# Altium PCB PCB.PcbDoc
Units mil, origin at the board's own origin, x right, y up, seen from the top; angles counter-clockwise.
Board outline 6000 x 4000 mil, 2 copper layers (Top Layer, Bottom Layer); 17 components, 9 nets, 50 pads, 0 vias.
Unrouted connection lines stored in the file: 7.
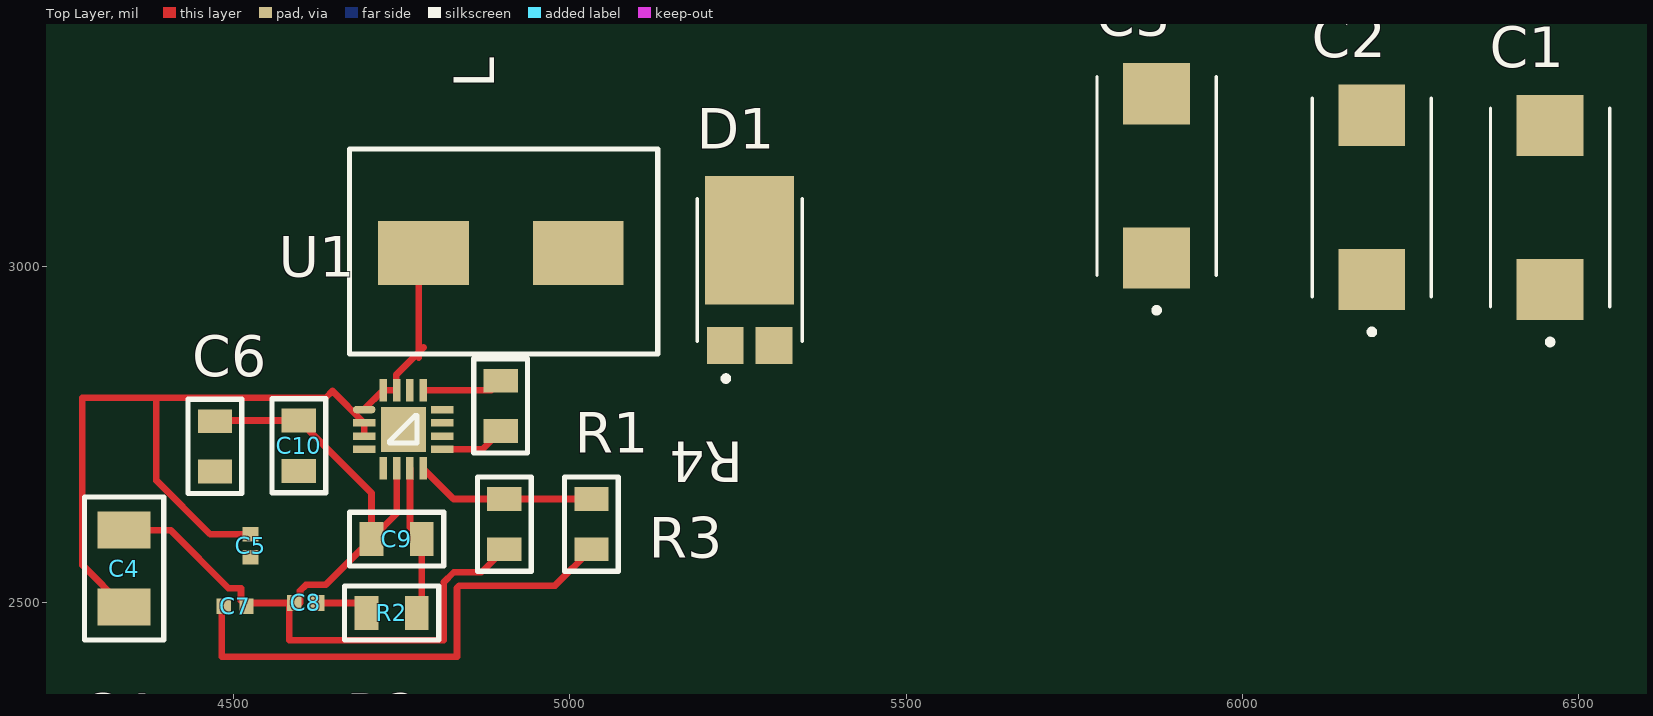
[diagram p0: Top Layer view]
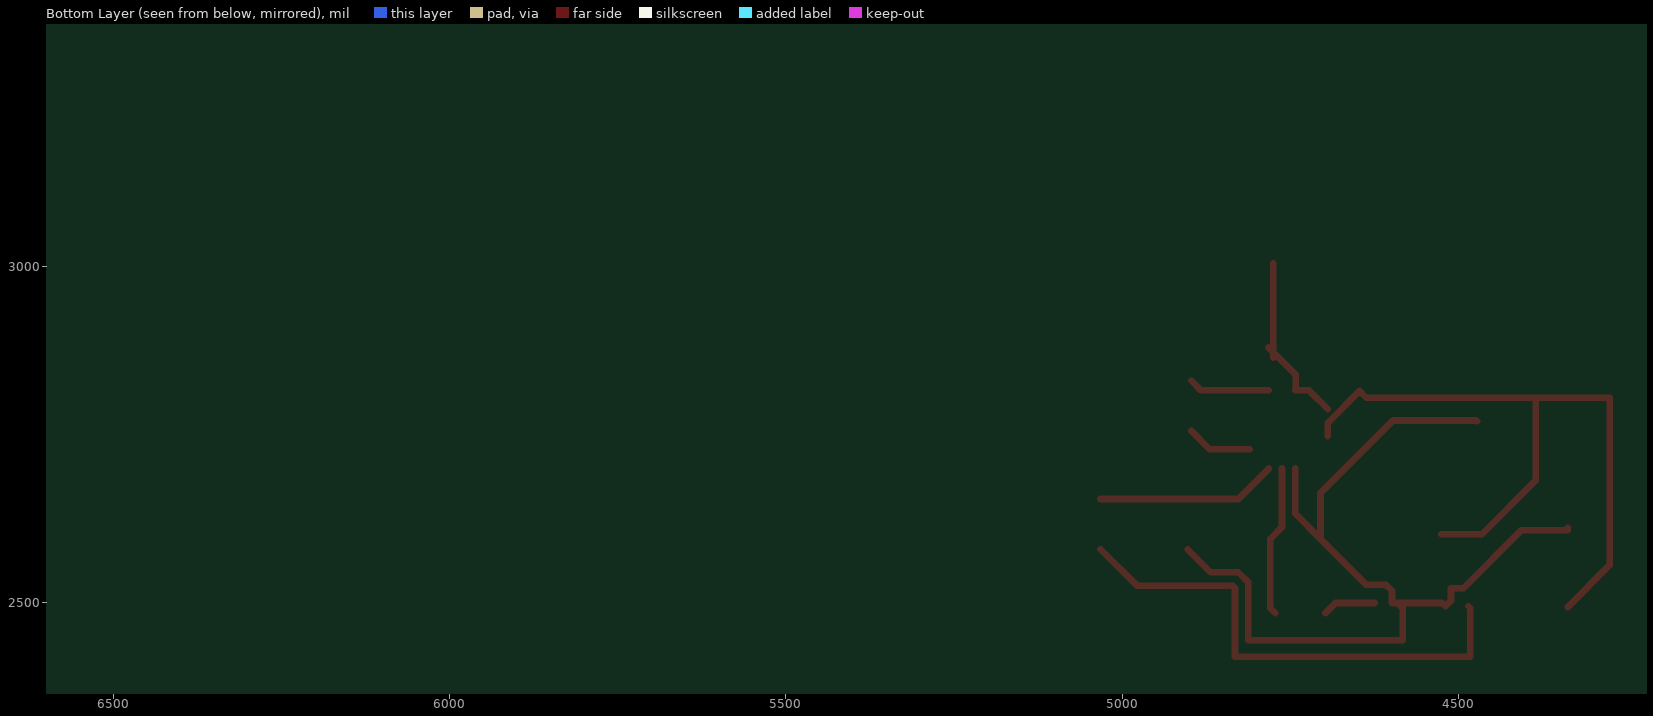
[diagram p1: Bottom Layer view, seen from below]
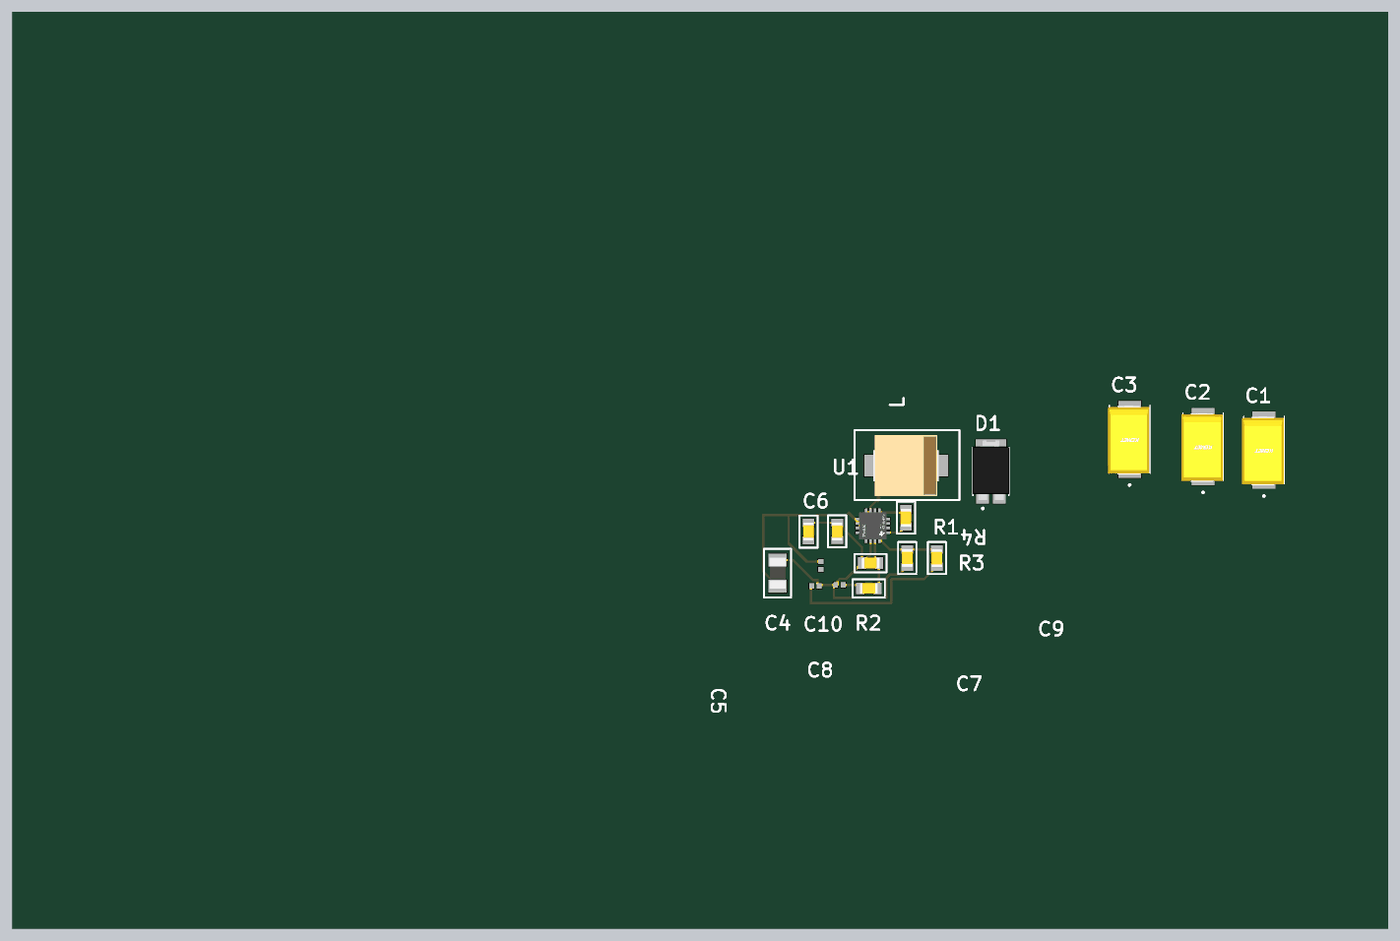
[diagram p2: 3D render of the assembled board from above, using the file's embedded part models]

## Layer stack, top to bottom
Top Solder: solder mask 0.4, Solder Resist, Dk 3.5
Top Layer: signal copper 1.4
Dielectric 1: dielectric 12.6, FR-4, Dk 4.8
Bottom Layer: signal copper 1.4
Bottom Solder: solder mask 0.4, Solder Resist, Dk 3.5

## Board outline
1000,1000 7000,1000 7000,5000 1000,5000

## Design rules (kind name [scope] priority, off if disabled: settings)
Clearance [All] p1: gap=10 ignorepadtopadclearanceinfootprint=FALSE except(0: Arc-Hole Track-Hole SMDPad-Hole THPad-Hole Via-Hole Fill-Hole Poly-Hole Region-Hole Text-Hole)
PolygonConnect [All] p1: connectstyle=Relief reliefconductorwidth=10 reliefentries=4 polygonreliefangle="90 Angle" airgapwidth=10
RoomDefinition TPS5530RTE_Schematic [InComponentClass('TPS5530RTE_Schematic')] p1: confinementstyle=ConfineIn formatcopy=TRUE lockcomponents=FALSE outline 2797.17,2410 6212.17,2410 6212.17,3010 2797.17,3010
RoutingVias [All] p1: holewidth=28 width=50 viastyle="Through Hole" minholewidth=28 minwidth=50 maxholewidth=28 maxwidth=50
SolderMaskExpansion [All] p1: expansion=4
Width [All] p1: maxlimit=10 minlimit=10 preferedwidth=10
30 further rules are at their usual default settings.

## Components (designator, comment, footprint, x,y, rotation, side; value= is the part's Value field where it differs from the comment)
C1 "10uF_New" CAPPM7343X310N 6457.17,3087.91 r90 top
C2 "10uF_New" CAPPM7343X310N 6192.17,3102.91 r90 top
C3 "10uF_New" CAPPM7343X310N 5872.17,3135 r90 top
C4 "10uF" C/R1206 4337.17,2551.06 r90 top
C5 "0.1uF" C/R0402 4525,2585 r270 top
C6 "10uF" C/R0805 4471.93,2735.47 r90 top
C7 "0.1uF" C/R0402 4502.17,2495 r180 top
C8 "510pF" C/R0402 4607.17,2500 r180 top
C9 "22nF" C/R0805 4745.04,2595.24 r0 top
C10 "22nF" C/R0805 4597.17,2730.83 r270 top
D1 "D1" D1 5272.17,2930 r0 top
L "2.2uH" L1 4897.17,3020 r180 top
R1 "127kohm" C/R0805 5032.17,2614.25 r270 top
R2 "2.94kOhm" C/R0805 4737.64,2485.24 r0 top
R3 "10kOhms" C/R0805 4902.17,2620 r90 top
R4 "38.3kohm" C/R0805 4897.17,2790 r270 top
U1 "TPS55330RTE" TPS55330 4752.17,2757.91 r0 top

## Footprints (in the part's own frame and the unit in brackets; to place one, negate y for a bottom-side part, rotate by r counter-clockwise, add the part's x,y. Pads: shape width x height; smd on the part's side, far side on the other; paste and mask are expansions set on the pad)
C/R0402 [mm]
  rect 0.54x0.6 smd: 1(-0.432,0) 2(0.432,0)
C/R0805 [mm]
  rect 0.9x1.3 smd: 1(-1.023,-0.006) 2(0.877,-0.006)
  silkscreen extent -1.85,-1.02 1.71,1.01, body extent -1.06,-0.61 0.94,0.59, height 0.96
C/R1206 [mm]
  rect 1.4x2 smd: 1(-1.45,0) 2(1.45,0)
  silkscreen extent -2.7,-1.5 2.7,1.5, body extent -1.7,-0.9 1.7,0.9, height 1.19
CAPPM7343X310N [mm]
  rect 2.31x2.52 smd: 1(-3.1,0) 2(3.1,0)
  silkscreen extent -5.18,-2.25 3.75,2.25, body extent -3.9,-2.2 3.7,2.4, height 3.11
D1 [mm]
  rect 1.39x1.4 smd: 1(-1.047,-1.205) 2(0.793,-1.205)
  rect 3.36x4.86 smd: 3(-0.127,2.777)
  silkscreen extent -2.11,-2.55 1.86,4.34, body extent -2.15,-1.52 1.91,5.08, height 1.16
L1 [mil]
  rect 135x95 smd: 1(-115,0) 2(115,0)
  silkscreen extent -233,-155 225,150, body extent -143,-133 143,133, height 199
TPS55330 [mm]
  oval 0.85x0.28 smd: 1(-1.475,0.75)
  rect 0.85x0.28 smd: 2(-1.475,0.25) 3(-1.475,-0.25) 4(-1.475,-0.75) 9(1.475,-0.75) 10(1.475,-0.25) 11(1.475,0.25) 12(1.475,0.75)
  rect 1.7x1.7 smd: 4(0,0)
  rect 0.28x0.85 smd: 5(-0.75,-1.475) 6(-0.25,-1.475) 7(0.25,-1.475) 8(0.75,-1.475) 13(0.75,1.475) 14(0.25,1.475) 15(-0.25,1.475) 16(-0.75,1.475)
  silkscreen extent -0.51,-0.51 0.51,0.52, body extent -1.51,-1.51 1.51,1.51, height 0.81

## Part data
C1 C2 C3: library part T495D106M035ATE125, "CAP TANT 10UF 35V 20% 2917", Capacitance=10μF, Capacitance Tolerance="± 20%", Capacitor Case Style="2917 ^7343 Metric]", Manufacturer=KEMET, Operating Temperature Max=125°C, Operating Temperature Min=-55°C, Voltage Rating=35V, ComponentLink1Description=https://www.verical.com/server-webapp/html/getDatasheet?partID=44813&src-supplier=Verical, ComponentLink1URL=https://www.verical.com/server-webapp/html/getDatasheet?partID=44813&src-supplier=Verical, ComponentLink2Description=http://www.farnell.com/datasheets/1761160.pdf?src-supplier=Element14, ComponentLink2URL=http://www.farnell.com/datasheets/1761160.pdf?src-supplier=Element14, ComponentLink3Description=http://www.farnell.com/datasheets/1744560.pdf?src-supplier=Element14, ComponentLink3URL=http://www.farnell.com/datasheets/1744560.pdf?src-supplier=Element14, ESR=0.125ohm, Manufacturer Part Number=T495D106M035ATE125, Packaging="Full Reel", Pricing 1="1=1.79, 10=1.449, 100=1.1066 (USD)", Product Range="KEMET - T495 Series", Stock 1=5675, Supplier 1=Digi-Key
C4: library part GRM31CR61C106KA88L, "Cap Ceramic 10uF 16V X5R 10% SMD 1206 85C T/R", Capacitance="10000000 pF", Case Size/Dimension=1206, Dielectric=X5R, Manufacturer=Murata, Rated voltage="16 V", Tolerance (%)="±10 %", ComponentLink1Description=http://psearch.murata.com/capacitor/product/GRM31CR61C106KA88%23.pdf?src-supplier=Avnet+Europe, ComponentLink1URL=http://psearch.murata.com/capacitor/product/GRM31CR61C106KA88%23.pdf?src-supplier=Avnet+Europe, ComponentLink2Description=https://www.murata.com/~/media/webrenewal/support/library/catalog/products/capacitor/mlcc/c02e.ashx?la=en-us&src-supplier=Digi-Key, ComponentLink2URL=https://www.murata.com/~/media/webrenewal/support/library/catalog/products/capacitor/mlcc/c02e.ashx?la=en-us&src-supplier=Digi-Key, ComponentLink3Description=http://search.murata.co.jp/Ceramy/image/img/A01X/partnumbering_e_01.pdf?src-supplier=Digi-Key, ComponentLink3URL=http://search.murata.co.jp/Ceramy/image/img/A01X/partnumbering_e_01.pdf?src-supplier=Digi-Key, ComponentLink4Description=http://psearch.murata.com/capacitor/product/GRM31CR61A476ME15%23.pdf?src-supplier=Future+Electronics, ComponentLink4URL=http://psearch.murata.com/capacitor/product/GRM31CR61A476ME15%23.pdf?src-supplier=Future+Electronics, ComponentLink5Description=https://www.distrelec.biz/Web/Downloads/_t/ds/murata_MLCC_eng_tds.pdf?mime=application%2Fpdf&src-supplier=Distrelec, ComponentLink5URL=https://www.distrelec.biz/Web/Downloads/_t/ds/murata_MLCC_eng_tds.pdf?mime=application%2Fpdf&src-supplier=Distrelec, ComponentLink6Description=http://www.farnell.com/datasheets/608985.pdf?src-supplier=Element14, ComponentLink6URL=http://www.farnell.com/datasheets/608985.pdf?src-supplier=Element14, ComponentLink7Description=http://psearch.en.murata.com/capacitor/product/GRM31CR61C106KA88%23.pdf?src-supplier=Avnet, ComponentLink7URL=http://psearch.en.murata.com/capacitor/product/GRM31CR61C106KA88%23.pdf?src-supplier=Avnet, Manufacturer Part Number=GRM31CR61C106KA88L, Pricing 1="1=0.37, 10=0.259 (USD)", Stock 1=45, Supplier 1=Digi-Key
C5 C7: library part GRM155R71C104KA88D, "CAP CER 0.1UF 16V X7R 0402", Capacitance="0.1 μF", Case Size/Dimension=0402, Dielectric=X7R, Manufacturer=Murata, Rated voltage="16 V", Tolerance (%)="±10 %", ComponentLink1Description=http://www.farnell.com/datasheets/4360.pdf?src-supplier=Element14, ComponentLink1URL=http://www.farnell.com/datasheets/4360.pdf?src-supplier=Element14, ComponentLink2Description=https://www.distrelec.biz/Web/Downloads/_t/ds/murata_MLCC_eng_tds.pdf?mime=application%2Fpdf&src-supplier=Distrelec, ComponentLink2URL=https://www.distrelec.biz/Web/Downloads/_t/ds/murata_MLCC_eng_tds.pdf?mime=application%2Fpdf&src-supplier=Distrelec, ComponentLink3Description=http://psearch.murata.com/capacitor/product/GRM155R71C103KA01%23.pdf?src-supplier=Future+Electronics, ComponentLink3URL=http://psearch.murata.com/capacitor/product/GRM155R71C103KA01%23.pdf?src-supplier=Future+Electronics, ComponentLink4Description=https://www.verical.com/server-webapp/html/getDatasheet?partID=85307&src-supplier=Verical, ComponentLink4URL=https://www.verical.com/server-webapp/html/getDatasheet?partID=85307&src-supplier=Verical, ComponentLink5Description=https://www.murata.com/~/media/webrenewal/support/library/catalog/products/capacitor/mlcc/c02e.ashx?la=en-us&src-supplier=Digi-Key, ComponentLink5URL=https://www.murata.com/~/media/webrenewal/support/library/catalog/products/capacitor/mlcc/c02e.ashx?la=en-us&src-supplier=Digi-Key, ComponentLink6Description=https://produktinfo.conrad.com/datenblaetter/450000-474999/454098-da-01-en-VS_KONDENSATOR_0402.pdf?src-supplier=Conrad, ComponentLink6URL=https://produktinfo.conrad.com/datenblaetter/450000-474999/454098-da-01-en-VS_KONDENSATOR_0402.pdf?src-supplier=Conrad, Manufacturer Part Number=GRM155R71C104KA88D, Pricing 1="1=0.1, 10=0.034, 100=0.0152, 500=0.0109, 1000=0.0086, 2500=0.0078, 5000=0.0072 (USD)", Stock 1=143464293, Supplier 1=Digi-Key
C6: library part CGA6P3X7S1H106K250AB, "TDK - CGA6P3X7S1H106K250AB - CAP, 10μF, 50V, 10%, X7S, 1210", Capacitance=10μF, Manufacturer=TDK, Operating Temperature="-55°C ~ 125°C", Package / Case="1210 (3225 Metric)", PCN Part Number="MLCC Part Number Change 30/Nov/2012", Ratings=AEC-Q200, Standard Package=1, Temperature Coefficient=X7S, Tolerance=±10%, Voltage - Rated=50V, Applications=Automotive, Category=Capacitors, ComponentLink1Description=http://www.farnell.com/datasheets/1807242.pdf?src-supplier=Element14, ComponentLink1URL=http://www.farnell.com/datasheets/1807242.pdf?src-supplier=Element14, ComponentLink2Description=http://www.mouser.com/ds/2/400/lcc_automotive_general_en-843974.pdf?src-supplier=Mouser, ComponentLink2URL=http://www.mouser.com/ds/2/400/lcc_automotive_general_en-843974.pdf?src-supplier=Mouser, Family="Ceramic Capacitors", Featured Product="CGA Series MLCC Capacitors", Features=-, Height - Seated (Max)=-, Kits="445-9005-KIT-ND  - KIT CAP CER AUTO 6.3V-50V SMD SAMPLE KIT 1005-ND  - KIT CAP CER AUTO 6.3V-50V", Lead Spacing=-, Lead Style=-, Manufacturer Part Number=CGA6P3X7S1H106K250AB, Mounting Type="Surface Mount, MLCC", Online Catalog="CGA Series, Automotive General, Mid and High Voltage", Other Names=445-7004-1, Packaging="Cut Tape (CT)? ?", Pricing 1="1=1.03, 10=0.785, 100=0.5615, 500=0.4347 (USD)", Product Training Modules="CGA Series for Automotive Applications SEAT, CCV, and TVCL Design Tools Guide to Replacing an Electrolytic Capacitor with an MLCC", RoHS Information="RoHS Certificate-MLCC", Series=CGA, Size / Dimension="0.126\" L x 0.098\" W (3.20mm x 2.50mm)", Stock 1=318964, Supplier 1=Digi-Key, Thickness (Max)="0.110\" (2.80mm)"
C8: library part GRM1555C1H511GA01D, "Cap Ceramic 510pF 50V C0G 2% SMD 0402 125C Paper T/R", Capacitance="510 pF", Case Code - in=0402, Case Code - mm=1005, Case Height="0.5 mm", Case Length="1 mm", Dielectric="C0G (NP0)", Manufacturer=Murata, Maximum Operating Temperature="+ 125 C", Minimum Operating Temperature="- 55 C", Package / Case="0402 (1005 metric)", Tolerance="2 %", Voltage Rating DC="50 V", Brand="Murata Electronics", Case Width="0.5 mm", ComponentLink1Description=https://www.murata.com/~/media/webrenewal/support/library/catalog/products/capacitor/mlcc/c02e.ashx?la=en-us&src-supplier=Digi-Key, ComponentLink1URL=https://www.murata.com/~/media/webrenewal/support/library/catalog/products/capacitor/mlcc/c02e.ashx?la=en-us&src-supplier=Digi-Key, Factory Pack Quantity=10000, Manufacturer Part Number=GRM1555C1H511GA01D, Packaging=Reel, Pricing 1="1=0.19, 10=0.131, 100=0.0664, 500=0.0454, 1000=0.0402, 2500=0.0385, 5000=0.035 (USD)", Product="General Type MLCCs", Product Category="Multilayer Ceramic Capacitors MLCC - SMD/SMT", RoHS=Details, Series=GRM, Stock 1=21664, Supplier 1=Digi-Key, Termination Style=SMD/SMT, Type="General Purpose MLCC"
C9: library part CGA4J2C0G1H223J125AA, "TDK - CGA4J2C0G1H223J125AA - KONDENSATOR 0.022μF 50V 5% C0G/NP0 0805", Capacitance=0.022μF, Manufacturer=TDK, Operating Temperature="-55°C ~ 125°C", Package / Case="0805 (2012 Metric)", PCN Part Number="MLCC Part Number Change 30/Nov/2012", Ratings=AEC-Q200, Standard Package=1, Temperature Coefficient="C0G, NP0", Tolerance=±5%, Voltage - Rated=50V, Applications=Automotive, Category=Capacitors, ComponentLink1Description=http://www.mouser.com/ds/2/400/lcc_automotive_general_en-843974.pdf?src-supplier=Mouser, ComponentLink1URL=http://www.mouser.com/ds/2/400/lcc_automotive_general_en-843974.pdf?src-supplier=Mouser, Family="Ceramic Capacitors", Featured Product="CGA Series MLCC Capacitors", Features=-, Height - Seated (Max)=-, Lead Spacing=-, Lead Style=-, Manufacturer Part Number=CGA4J2C0G1H223J125AA, Mounting Type="Surface Mount, MLCC", Online Catalog="CGA Series, Automotive General, Mid and High Voltage", Other Names=445-6949-6, Packaging="Digi-Reel?? ?", Pricing 1="5=0.594, 10=0.351, 25=0.305, 50=0.259, 100=0.213, 250=0.194, 500=0.175, 1000=0.152 (USD)", Product Training Modules="CGA Series for Automotive Applications SEAT, CCV, and TVCL Design Tools Guide to Replacing an Electrolytic Capacitor with an MLCC", RoHS Information="RoHS Certificate-MLCC", Series=CGA, Size / Dimension="0.079\" L x 0.049\" W (2.00mm x 1.25mm)", Stock 1=19725, Supplier 1=Newark, Thickness (Max)="0.057\" (1.45mm)"
C10: library part C0805C223K5RAC, "KEMET 22nF Multilayer Ceramic Capacitor (MLCC) 50V dc 10% X7R dielectric max op. temp. 125C", Capacitance Tolerance=±10%, Manufacturer=KEMET, Rated voltage=50VDC, Temperature range=-55...+125°C, Capacitance=22nF, Ceramic type=X7R, ComponentLink1Description=http://www.mouser.com/ds/2/212/KEM_C1002_X7R_SMD-1102033.pdf?src-supplier=Mouser, ComponentLink1URL=http://www.mouser.com/ds/2/212/KEM_C1002_X7R_SMD-1102033.pdf?src-supplier=Mouser, ComponentLink2Description=https://www1.elfa.se/data1/wwwroot/assets/datasheets/slCeramic-Chip-Condensers_e.pdf?src-supplier=Distrelec, ComponentLink2URL=https://www1.elfa.se/data1/wwwroot/assets/datasheets/slCeramic-Chip-Condensers_e.pdf?src-supplier=Distrelec, Construction form=0805, Manufacturer Part Number=C0805C223K5RAC, Pricing 1="1=0.1, 10=0.024, 100=0.016, 500=0.014, 1000=0.011, 4000=0.008 (USD)", Stock 1=133849, Supplier 1=Mouser
D1: library part PDS760-13, "DIODE SCHOTTKY 60V 7A POWERDI5", If - Forward Current="7 A", Ifsm - Forward Surge Current="275 A", Ir - Reverse Current="200 uA", Manufacturer=Diodes, Maximum Operating Temperature="+ 150 C", Minimum Operating Temperature="- 65 C", Operating Temperature Range="- 65 C to + 150 C", Package / Case=POWERDI-5, Vf - Forward Voltage="0.62 V", Vrrm - Repetitive Reverse Voltage="60 V", Brand="Diodes Incorporated", ComponentLink1Description=https://www.diodes.com/assets/Datasheets/ds30477.pdf?src-supplier=Digi-Key, ComponentLink1URL=https://www.diodes.com/assets/Datasheets/ds30477.pdf?src-supplier=Digi-Key, ComponentLink2Description=http://www.mouser.com/ds/2/115/ds30477-62081.pdf?src-supplier=Mouser, ComponentLink2URL=http://www.mouser.com/ds/2/115/ds30477-62081.pdf?src-supplier=Mouser, ComponentLink3Description=http://www.farnell.com/datasheets/1915491.pdf?src-supplier=Element14, ComponentLink3URL=http://www.farnell.com/datasheets/1915491.pdf?src-supplier=Element14, ComponentLink4Description=http://www.diodes.com/datasheets/ds30477.pdf?src-supplier=Avnet, ComponentLink4URL=http://www.diodes.com/datasheets/ds30477.pdf?src-supplier=Avnet, ComponentLink5Description=http://www.diodes.com/datasheets/ds30477.pdf?src-supplier=Future+Electronics, ComponentLink5URL=http://www.diodes.com/datasheets/ds30477.pdf?src-supplier=Future+Electronics, ComponentLink6Description=http://www.diodes.com/datasheets/ds30477.pdf?src-supplier=Avnet+Europe, ComponentLink6URL=http://www.diodes.com/datasheets/ds30477.pdf?src-supplier=Avnet+Europe, Configuration="Single Dual Anode", Factory Pack Quantity=5000, Height="1.15 mm", Length="4.05 mm", Manufacturer Part Number=PDS760-13, Mounting Style=SMD/SMT, Packaging=Reel, Pricing 1="1=1.54, 10=1.381, 100=1.0764, 500=0.8892, 1000=0.702 (USD)", Product="Schottky Diodes", Product Category="Schottky Diodes & Rectifiers", RoHS=True, Series=PDS560, Stock 1=80872, Supplier 1=Digi-Key, Technology=Si, Type="Schottky Diode", Unit Weight="0.003386 oz", Width="5.45 mm"
L: library part IHLP2525EZER2R2M01, "Fixed Inductors 2.2uH 20%", Inductance="2.2 uH", Manufacturer="Vishay Dale", Maximum DC Current="10 A", Maximum DC Resistance="13.6 mOhms", Operating Temperature Range="- 55 C to + 125 C", Package / Case="2525 (6363 metric)", Self Resonant Frequency="1 MHz", Test Frequency="100 kHz", Tolerance="20 %", Brand="Vishay / Dale", ComponentLink1Description=http://uk.rs-online.com/webdocs/102c/0900766b8102c936.pdf?src-supplier=RSComponents, ComponentLink1URL=http://uk.rs-online.com/webdocs/102c/0900766b8102c936.pdf?src-supplier=RSComponents, ComponentLink2Description=http://www.mouser.com/ds/2/427/ihlp-2525ez-01-221830.pdf?src-supplier=Mouser, ComponentLink2URL=http://www.mouser.com/ds/2/427/ihlp-2525ez-01-221830.pdf?src-supplier=Mouser, ComponentLink3Description=http://www.farnell.com/datasheets/2047080.pdf?src-supplier=Element14, ComponentLink3URL=http://www.farnell.com/datasheets/2047080.pdf?src-supplier=Element14, Factory Pack Quantity=500, Height="5 mm", Length="6.86 mm", Manufacturer Part Number=IHLP2525EZER2R2M01, Mounting Style="Solder Pad", Packaging=Reel, Pricing 1="1=3.11, 10=2.846, 100=1.863 (USD)", Product="Power Inductors", Product Category="Fixed Inductors", RoHS=True, Series=IHLP-2525EZ-01, Shielding=Shielded, Stock 1=2918, Supplier 1=Digi-Key, Termination Style=SMD/SMT, Type="Low Profile High Current IHLP Inductors", Width="6.47 mm"
R1: library part ERA-6AEB1273V, "RES SMD 127K OHM 0.1% 1/8W 0805", Manufacturer=Panasonic, Operating Temperature Max=155°C, Operating Temperature Min=-55°C, Operating Temperature Range="-55°C to +155°C", Power Rating=125mW, Resistance Tolerance="± 0.1%", Resistor Case Style="0805 [2012 Metric]", Resistor Element Material="Thin Film", Resistor Mounting=SMD, Temperature Coefficient="± 25ppm/°C", Voltage Rating=100V, ComponentLink1Description=http://www.farnell.com/datasheets/485442.pdf?src-supplier=Farnell, ComponentLink1URL=http://www.farnell.com/datasheets/485442.pdf?src-supplier=Farnell, ComponentLink2Description=http://industrial.panasonic.com/www-data/pdf/AOA0000/AOA0000CE26.pdf?src-supplier=Avnet, ComponentLink2URL=http://industrial.panasonic.com/www-data/pdf/AOA0000/AOA0000CE26.pdf?src-supplier=Avnet, ComponentLink3Description=http://www.farnell.com/datasheets/485442.pdf?src-supplier=Element14, ComponentLink3URL=http://www.farnell.com/datasheets/485442.pdf?src-supplier=Element14, ComponentLink4Description=http://uk.rs-online.com/webdocs/0eb1/0900766b80eb1d8c.pdf?src-supplier=RSComponents, ComponentLink4URL=http://uk.rs-online.com/webdocs/0eb1/0900766b80eb1d8c.pdf?src-supplier=RSComponents, ComponentLink5Description=http://www.produktinfo.conrad.com/datenblaetter/1100000-1199999/001181360-da-01-en-WIDERSTAND_ERA_0805_127K_0_1__5000ST.pdf?src-supplier=Conrad, ComponentLink5URL=http://www.produktinfo.conrad.com/datenblaetter/1100000-1199999/001181360-da-01-en-WIDERSTAND_ERA_0805_127K_0_1__5000ST.pdf?src-supplier=Conrad, External Depth=1.25mm, External Length / Height=0.5mm, External Width=2mm, Manufacturer Part Number=ERA-6AEB1273V, No. of Pins=2, Packaging=Reel, Pricing 1="1=0.36, 10=0.302, 100=0.1182, 1000=0.0495, 2500=0.0454 (USD)", Product Range="PANASONIC - ERA Series Metal Film Chip Resistor", Resistance=127kohm, Series=ERA, Stock 1=14724, Supplier 1=Digi-Key
R2: library part ERA-6AEB2941V, "RES SMD 2.94K OHM 0.1% 1/8W 0805", Manufacturer=Panasonic, Operating Temperature Max=155°C, Operating Temperature Min=-55°C, Operating Temperature Range="-55°C to +155°C", Power Rating=125mW, Resistance=2.94kohm, Resistance Tolerance="± 0.1%", Resistor Case Style="0805 [2012 Metric]", Resistor Element Material="Thin Film", Resistor Mounting=SMD, Temperature Coefficient="± 25ppm/°C", Voltage Rating=100V, ComponentLink1Description=http://uk.rs-online.com/webdocs/0eb1/0900766b80eb1d8c.pdf?src-supplier=RSComponents, ComponentLink1URL=http://uk.rs-online.com/webdocs/0eb1/0900766b80eb1d8c.pdf?src-supplier=RSComponents, ComponentLink2Description=http://www.farnell.com/datasheets/485442.pdf?src-supplier=Farnell, ComponentLink2URL=http://www.farnell.com/datasheets/485442.pdf?src-supplier=Farnell, ComponentLink3Description=http://industrial.panasonic.com/www-data/pdf/AOA0000/AOA0000CE26.pdf?src-supplier=Avnet, ComponentLink3URL=http://industrial.panasonic.com/www-data/pdf/AOA0000/AOA0000CE26.pdf?src-supplier=Avnet, ComponentLink4Description=http://www.farnell.com/datasheets/485442.pdf?src-supplier=Element14, ComponentLink4URL=http://www.farnell.com/datasheets/485442.pdf?src-supplier=Element14, ComponentLink5Description=http://industrial.panasonic.com/www-data/pdf/AOA0000/AOA0000CE26.pdf?src-supplier=Avnet+Europe, ComponentLink5URL=http://industrial.panasonic.com/www-data/pdf/AOA0000/AOA0000CE26.pdf?src-supplier=Avnet+Europe, ComponentLink6Description=http://www.mouser.com/ds/2/315/AOA0000C237-1100991.pdf?src-supplier=Mouser, ComponentLink6URL=http://www.mouser.com/ds/2/315/AOA0000C237-1100991.pdf?src-supplier=Mouser, ComponentLink7Description=http://www.produktinfo.conrad.com/datenblaetter/1100000-1199999/001181273-da-01-en-WIDERSTAND_ERA_0805_2K94_0_1__5000ST.pdf?src-supplier=Conrad, ComponentLink7URL=http://www.produktinfo.conrad.com/datenblaetter/1100000-1199999/001181273-da-01-en-WIDERSTAND_ERA_0805_2K94_0_1__5000ST.pdf?src-supplier=Conrad, External Depth=1.25mm, External Length / Height=0.5mm, External Width=2mm, Manufacturer Part Number=ERA-6AEB2941V, No. of Pins=2, Packaging=Reel, Pricing 1="1=0.36, 10=0.302, 100=0.1182, 1000=0.0495, 2500=0.0454 (USD)", Product Range="PANASONIC - ERA Series", Series=ERA, Stock 1=28336, Supplier 1=Digi-Key
R3: library part CRCW080510K0FKEC, "Res Thick Film 0805 10K Ohm 1% 0.125W(1/8W) ±100ppm/C Molded SMD Automotive Paper T/R", Manufacturer="Vishay Dale", Operating Temperature="-55°C ~ 155°C", Package / Case="0805 (2012 Metric)", Power (Watts)="0.125W, 1/8W", Resistance (Ohms)=10k, Supplier Device Package=0805, Temperature Coefficient=±100ppm/°C, Tolerance=±1%, Category=Resistors, ComponentLink1Description=http://www.vishay.com/docs/20035/dcrcwe3.pdf?src-supplier=Avnet, ComponentLink1URL=http://www.vishay.com/docs/20035/dcrcwe3.pdf?src-supplier=Avnet, Composition="Thick Film", Failure Rate=-, Family="Chip Resistor - Surface Mount", Features="Automotive AEC-Q200", Height="0.020\" (0.50mm)", Manufacturer Part Number=CRCW080510K0FKEC, Number of Terminations=2, Packaging="Tape & Reel (TR)", Part Status=Active, Pricing 1="1=0.1, 10=0.066, 100=0.0267, 1000=0.012, 2500=0.0104, 5000=0.0086 (USD)", Series=CRCW, Size / Dimension="0.079\" L x 0.049\" W (2.00mm x 1.25mm)", Stock 1=19837, Supplier 1=Digi-Key
R4: library part ERA-6AEB3832V, "RES SMD 38.3K OHM 0.1% 1/8W 0805", Manufacturer=Panasonic, Operating Temperature Max=155°C, Operating Temperature Min=-55??C, Operating Temperature Range="-55°C to +155°C", Power Rating=125mW, Resistance Tolerance="± 0.1%", Resistor Case Style="0805 [2012 Metric]", Resistor Element Material="Thin Film", Resistor Mounting=SMD, Temperature Coefficient="± 25ppm/°C", Voltage Rating=100V, ComponentLink1Description=http://uk.rs-online.com/webdocs/0eb1/0900766b80eb1d8c.pdf?src-supplier=RSComponents, ComponentLink1URL=http://uk.rs-online.com/webdocs/0eb1/0900766b80eb1d8c.pdf?src-supplier=RSComponents, ComponentLink2Description=http://industrial.panasonic.com/www-data/pdf/AOA0000/AOA0000CE26.pdf?src-supplier=Avnet, ComponentLink2URL=http://industrial.panasonic.com/www-data/pdf/AOA0000/AOA0000CE26.pdf?src-supplier=Avnet, ComponentLink3Description=http://industrial.panasonic.com/www-data/pdf/AOA0000/AOA0000CE26.pdf?src-supplier=Avnet+Europe, ComponentLink3URL=http://industrial.panasonic.com/www-data/pdf/AOA0000/AOA0000CE26.pdf?src-supplier=Avnet+Europe, ComponentLink4Description=http://www.produktinfo.conrad.com/datenblaetter/1100000-1199999/001181330-da-01-en-WIDERSTAND_ERA_0805_38K3_0_1__5000ST.pdf?src-supplier=Conrad, ComponentLink4URL=http://www.produktinfo.conrad.com/datenblaetter/1100000-1199999/001181330-da-01-en-WIDERSTAND_ERA_0805_38K3_0_1__5000ST.pdf?src-supplier=Conrad, External Depth=1.25mm, External Length / Height=0.5mm, External Width=2mm, Manufacturer Part Number=ERA-6AEB3832V, No. of Pins=2, Packaging=Reel, Pricing 1="1=0.36, 10=0.302, 100=0.1182, 1000=0.0495, 2500=0.0454 (USD)", Product Range="PANASONIC - ERA", Resistance=38.3kohm, Series=ERA, Stock 1=22091, Supplier 1=Digi-Key
U1: Current - Output=5A, Frequency - Switching="94kHz ~ 1.14MHz", Manufacturer="Texas Instruments", Manufacturer Part Number=TPS55330RTER, Operating Temperature="-40°C ~ 150°C", Package / Case="16-WFQFN Exposed Pad", Standard Package=3,000, Supplier Device Package="16-WQFN (3x3)", Voltage - Input="2.9 V ~ 16 V", Voltage - Output="2.9 V ~ 22 V", Category="Integrated Circuits (ICs)", ComponentLink1Description=http://www.ti.com/lit/ds/symlink/tps55330.pdf?src-supplier=Digi-Key, ComponentLink1URL=http://www.ti.com/lit/ds/symlink/tps55330.pdf?src-supplier=Digi-Key, ComponentLink2Description=http://www.ti.com/lit/ds/symlink/tps55330.pdf?src-supplier=Avnet, ComponentLink2URL=http://www.ti.com/lit/ds/symlink/tps55330.pdf?src-supplier=Avnet, Family="PMIC - Voltage Regulators - DC DC Switching Regulators", Minimum Quantity="Step-Up (Boost), Flyback, Sepic", Mounting Type="Surface Mount", Number of Outputs=1, Output Type=Adjustable, Package/Case="16-WFQFN Exposed Pad", Packaging="Tape & Reel (TR)", Pricing 1="1=3.12, 10=2.804, 100=2.1799, 500=1.8853, 1000=1.5672 (USD)", PWM Type="Current Mode", Quantity Available="Tape & Reel (TR)Alternate Packaging", Stock 1=5703, Supplier 1=Digi-Key, Synchronous Rectifier=No, Type="Step-Up (Boost), Flyback, Sepic"

## Nets (pads, with @x,y where several pads share a name; then routed paths per layer and width w, separated by ;. In a path a pad name is that pad's centre, name@x,y a point inside that pad or via, vN(x,y) a via of type N, cw(c..) or ccw(c..) an arc to the next point about the centre after c; other vN are vias at no path point)
GND: C4.2 C5.2 C6.2 C7.1 C8.2 C9.1 C10.1 R3.1 R4.1 U1.6 U1.11 U1.12 U1.13 | length 1552.9
  Top Layer w10: C4.2@4337.17,2611.81 C4.2 4406.02,2608.15 4492.36,2521.81 4510.79,2521.81 4510.79,2503.39 C7.1 4524.17,2500 C8.2 ; C6.2 4473.27,2771.1 C10.1 4704.76,2663.27 C9.1 ; U1.6 4742.32,2632.56 C9.1 ; U1.13 4882.64,2815.98 R4.1 ; R3.1 4868.27,2545.59 4827.19,2545.59 4812.17,2530.57 4812.17,2445 4811.57,2444.41 4582.76,2444.41 4582.76,2492.6 C8.2 ; C8.2 4598.54,2500 4598.54,2518.02 4607.33,2526.81 4636.57,2526.81 C9.1
NetC8_1: C8.1 R2.1 | length 79.4
  Top Layer w10: C8.1 4682.36,2500 R2.1
NetC9_2: C9.2 R2.2 U1.7 | length 225.2
  Top Layer w10: U1.7 4762.01,2612.56 C9.2 4779.57,2492.4 R2.2
NetC10_2: C10.2 U1.4
NetL_2: L.2 U1.1 U1.15 U1.16 | length 280.6
  Top Layer w10: U1.1@4694.09,2788.27 4721.81,2815.98 U1.16 U1.15@4741.5,2815.98 ; U1.15 U1.15@4741.5,2815.98 ; 4775,2864.6 4775,2872.43 ; L.2@4775,3005 4775,2872.43 ; 4782.17,2879.6 4775,2872.43 ; U1.15@4741.5,2815.98 4741.5,2838.93 4775,2872.43
NetR1_1: R1.1 R3.2 U1.8 | length 269
  Top Layer w10: U1.8 4827.01,2654.53 R3.2 R1.1
NetR4_2: R4.2 U1.9 | length 97.9
  Top Layer w10: U1.9 4869.84,2728.39 R4.2
Vin: C4.1 C5.1 U1.2 U1.3 | length 1095.4
  Top Layer w10: C4.1 4275,2556.14 4275,2805 4385,2805 ; C5.1 4465,2602.01 4385,2682.01 4385,2805 ; U1.3 U1.2 4646.85,2815 4636.85,2805 4385,2805
Vout: C6.1 C7.2 R1.2 | length 752.1
  Top Layer w10: C7.2 4482.17,2492.01 4482.17,2420 4832.17,2420 4832.17,2522.28 4835.47,2525.59 4977.8,2525.59 R1.2
pads on no net: C1.1 C1.2 C2.1 C2.2 C3.1 C3.2 D1.1 D1.2 D1.3 L.1 U1.5 U1.10 U1.14